# Altium PCB PCB_Arduino Nano扩展板_2021-06-07.pcbdoc
Units mil, origin at the board's own origin, x right, y up, seen from the top; angles counter-clockwise.
Board outline 4955 x 4010 mil, 2 copper layers (Top Layer, Bottom Layer); 42 components, 38 nets, 193 pads, 122 vias.
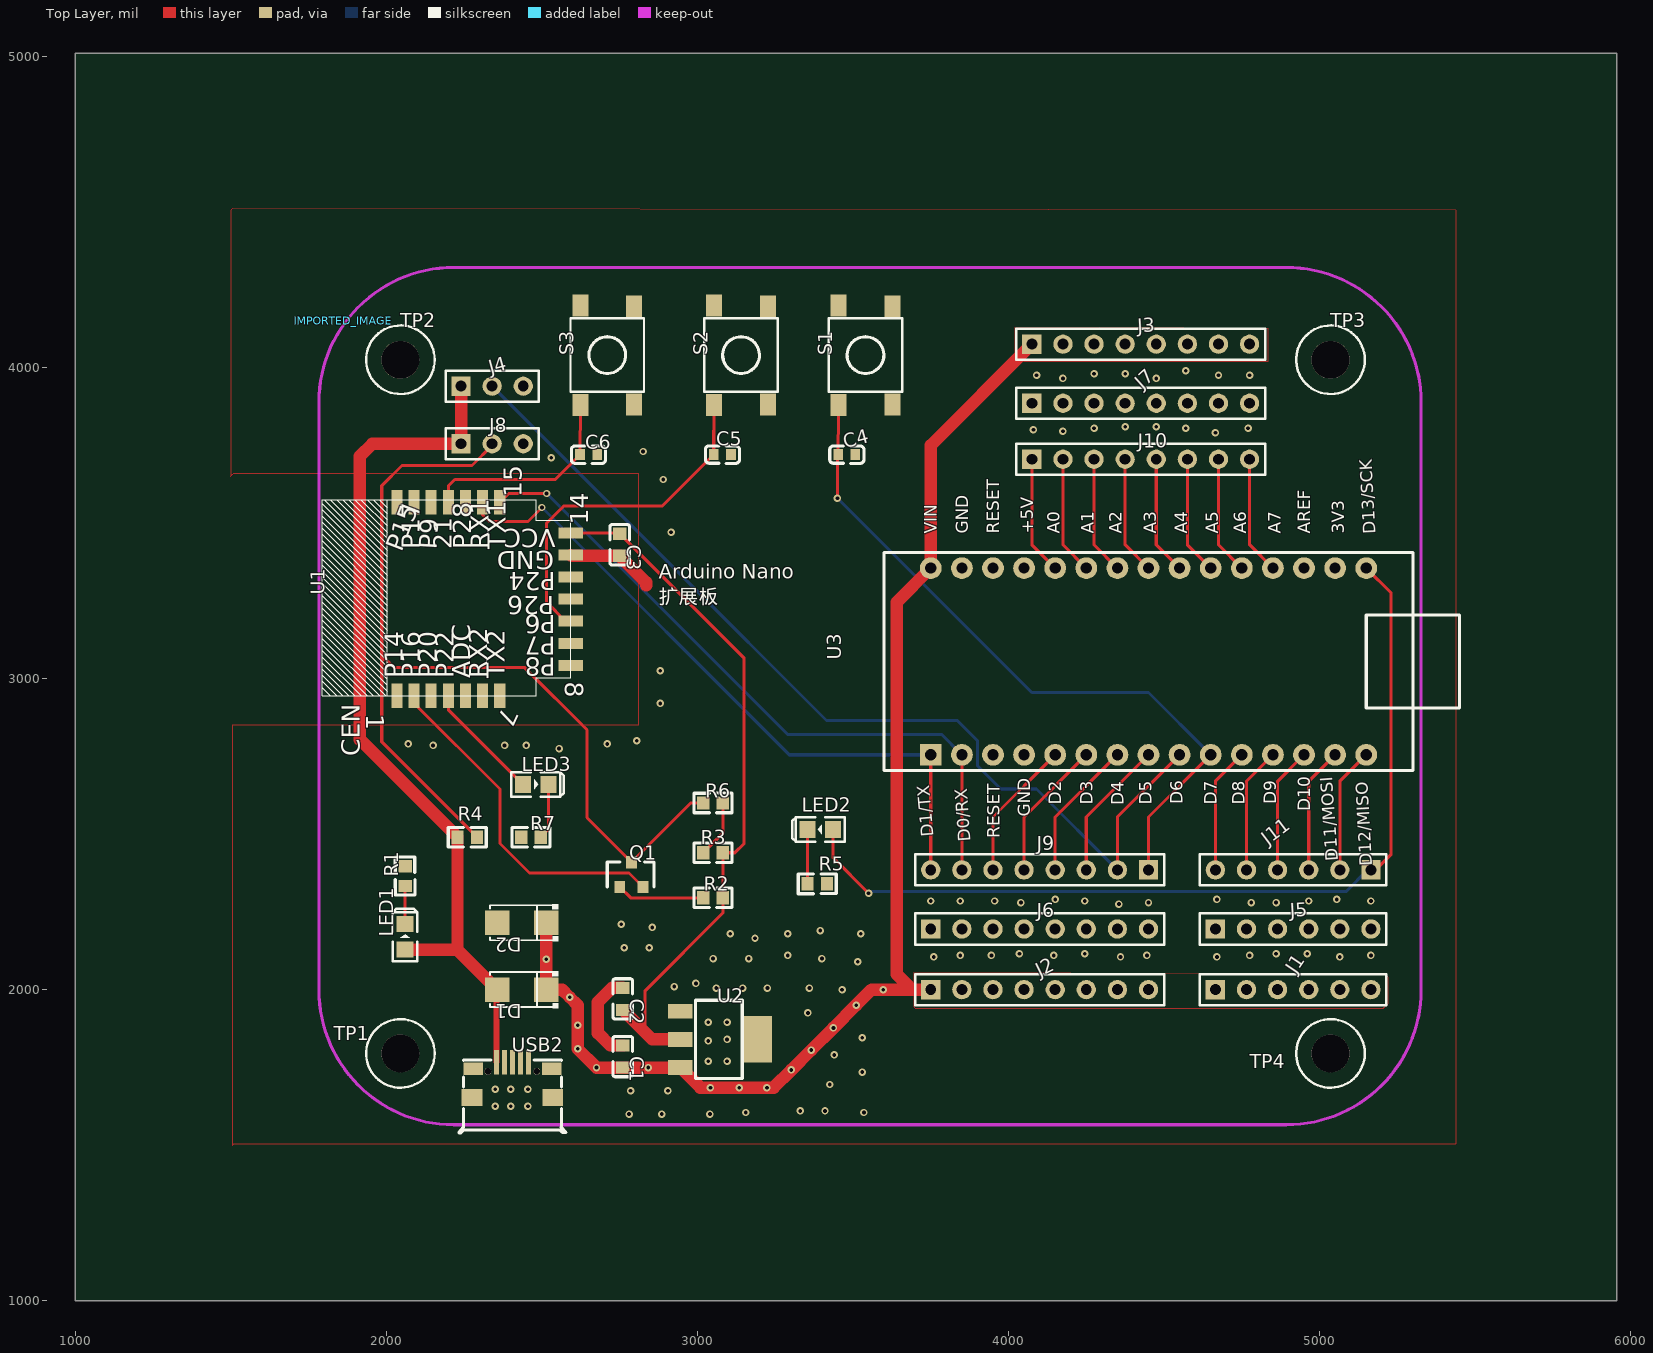
[diagram p0: Top Layer view]
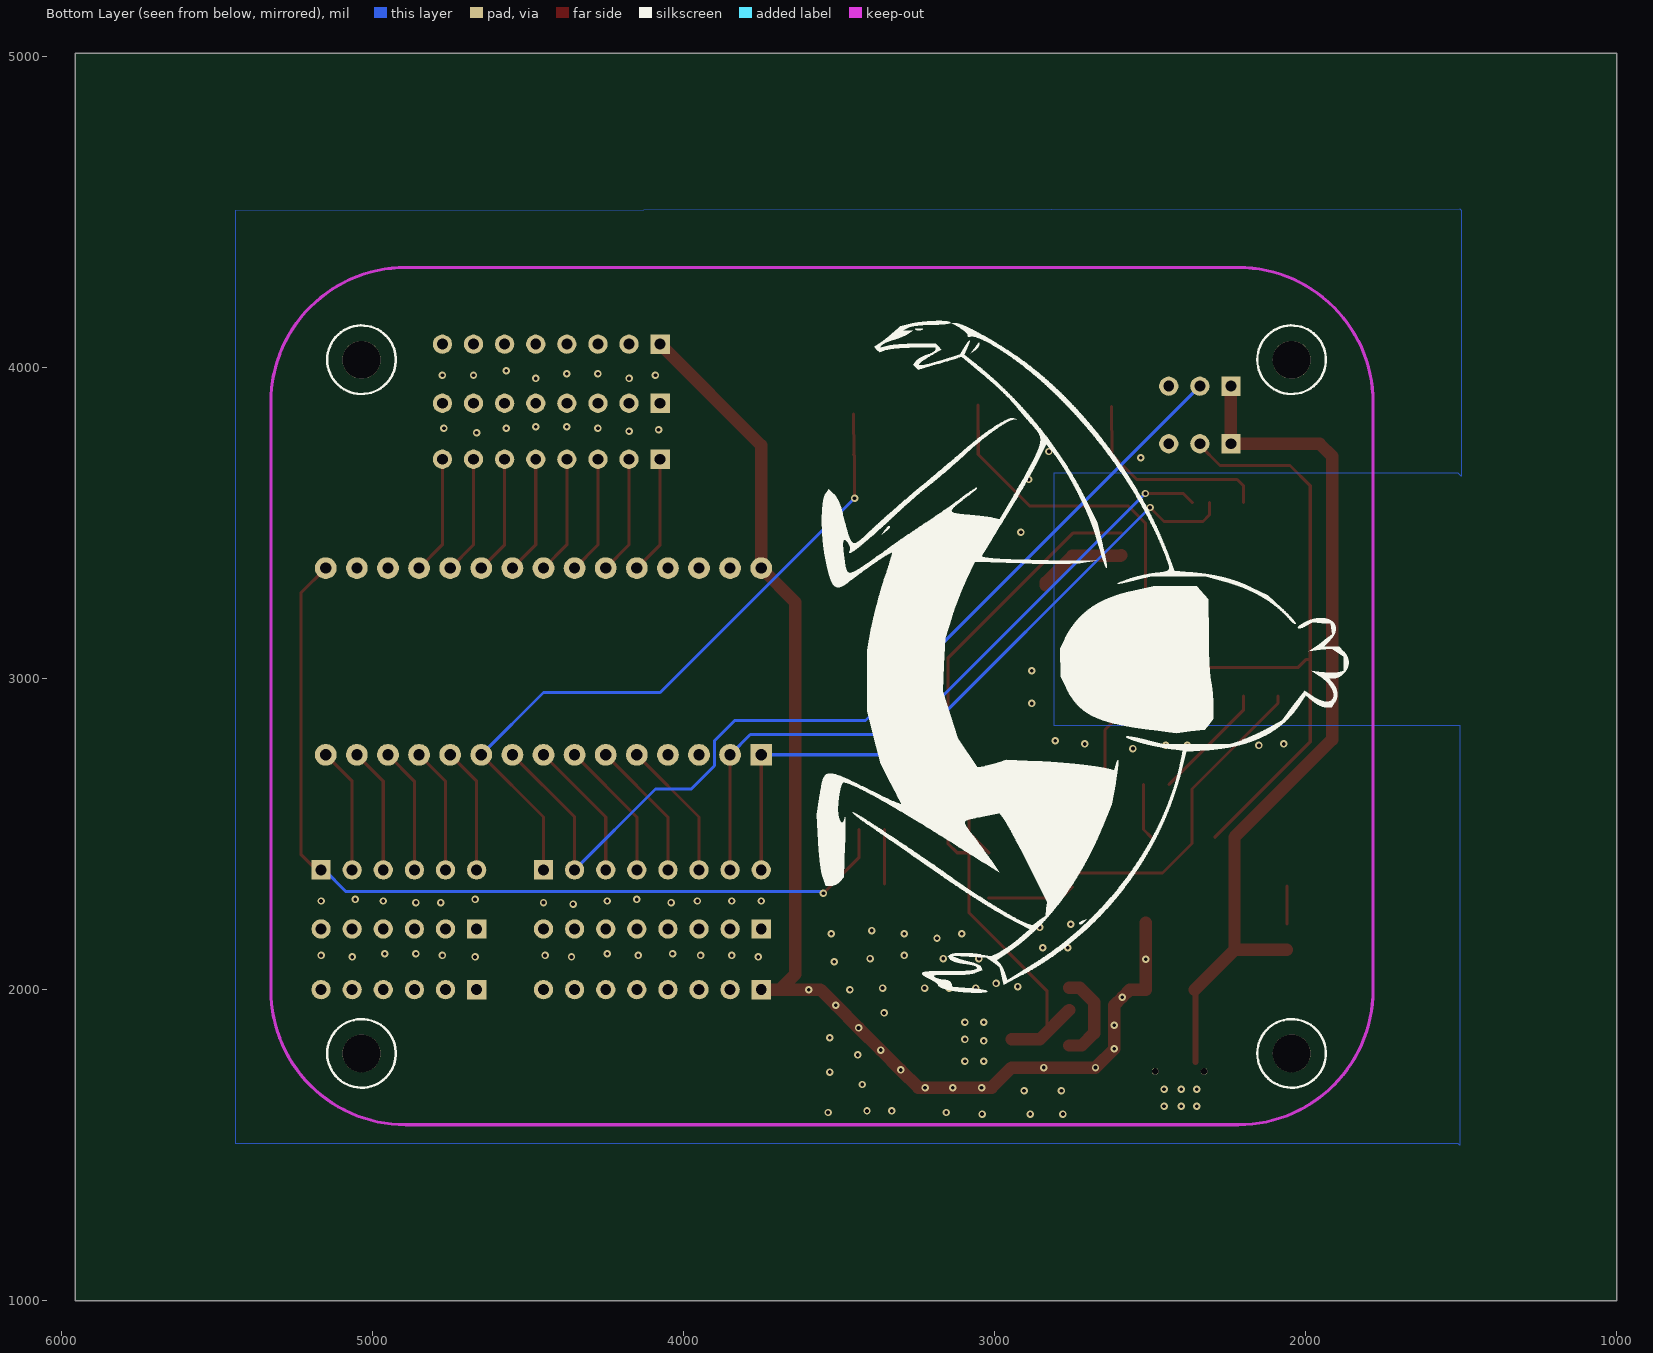
[diagram p1: Bottom Layer view, seen from below]

## Layer stack, top to bottom
Top Layer: signal copper (thickness not stored)
Dielectric: dielectric 12.6, FR-4, Dk 4.8
Bottom Layer: signal copper (thickness not stored)

## Board outline
5955,1000 1000,1000 1000,5010 5955,5010

## Components (designator, comment, footprint, x,y, rotation, side; value= is the part's Value field where it differs from the comment)
C1 "0.1u" C0603#1 2760,1785 r270 top
C2 "0.1u" C0603#1 2760,1970 r270 top
C3 "0.1u" C0603#1 2750,3430 r270 top
C4 "0.1u" C0603#2 3480,3720 r180 top
C5 "0.1u" C0603#2 3080,3720.21 r180 top
C6 "0.1u" C0603#2 2649.96,3719.6 r0 top
D1 "SS14-A" SMA_L4.3-W2.6-LS5.2-RD 2435,2000 r180 top
D2 "SS14-A" SMA_L4.3-W2.6-LS5.2-RD 2435,2215 r180 top
IMPORTED_IMAGE "IMPORTED_IMAGE" IMPORTED_IMAGE 1861.49,4149.64 r0 top
J1 "HDR-M-2.54_1x6" HDR-M-2.54_1X6 4915,2000 r0 top
J2 "HDR-M-2.54_1x8" HDR-M-2.54_1X8 4150,2000 r0 top
J3 "HDR-M-2.54_1x8" HDR-M-2.54_1X8 4475,4075 r0 top
J4 "HDR-M-2.54_1x3" HDR-M-2.54_1X3 2340,3940 r0 top
J5 "HDR-M-2.54_1x6" HDR-M-2.54_1X6 4915,2195 r0 top
J6 "HDR-M-2.54_1x8" HDR-M-2.54_1X8 4150,2195 r0 top
J7 "HDR-M-2.54_1x8" HDR-M-2.54_1X8 4475,3885 r0 top
J8 "HDR-M-2.54_1x3" HDR-M-2.54_1X3 2340,3755 r0 top
J9 "HDR-M-2.54_1x8" HDR-M-2.54_1X8 4050,2385 r180 top
J10 "HDR-M-2.54_1x8" HDR-M-2.54_1X8 4475,3705 r0 top
J11 "HDR-M-2.54_1x6" HDR-M-2.54_1X6 4915,2385 r180 top
LED1 "LED-0805_B" LED0805_BLUE 2060,2170 r90 top
LED2 "LED-0805_B" LED0805_BLUE 3395,2515 r180 top
LED3 "LED-0805_B" LED0805_BLUE 2480,2660 r0 top
Q1 "S8050" SOT-23-NPN 2750,2330 r0 top
R1 "1k" R0603 2060,2365 r90 top
R2 "2k" R0603 3050,2295 r0 top
R3 "2k" R0603 3050,2440 r0 top
R4 "2k" R0603 2260,2490 r180 top
R5 "1k" R0603 3385,2340 r180 top
R6 "0R" R0603 3050,2600 r0 top
R7 "1k" R0603 2465,2490 r0 top
S1 "KEY_SW2" KEY4-SMD 3540,4040 r90 top
S2 "KEY_SW2" KEY4-SMD 3140,4040 r90 top
S3 "KEY_SW2" KEY4-SMD 2710,4040 r90 top
TP1 "M3铜柱" M3铜柱 2045,1795 r0 top
TP2 "M3铜柱" M3铜柱 2045,4025 r0 top
TP3 "M3铜柱" M3铜柱 5035,4025 r0 top
TP4 "M3铜柱" M3铜柱 5035,1795 r0 top
U1 "WIFI_BLE_CBU" WIFI_BLE_CBU 2330,3260 r90 top
U2 "GM1117-3.3ST3T" SOT-223 3070,1840 r0 top
U3 "NUCLEO-L031K6" ARDUINO_NANO 4455,3060 r90 top
USB2 "MICROQTJ" MICRO-USB-SMD_MICROQTJ 2405,1710 r0 top

## Footprints (in the part's own frame and the unit in brackets; to place one, negate y for a bottom-side part, rotate by r counter-clockwise, add the part's x,y. Pads: shape width x height; smd on the part's side, far side on the other; paste and mask are expansions set on the pad)
ARDUINO_NANO [mil]
  rect 70x70 hole 36: 1(-305,705)
  round 70 hole 36: 2(-305,605) 3(-305,505) 4(-305,405) 5(-305,305) 6(-305,205) 7(-305,105) 8(-305,5) 9(-305,-95) 10(-305,-195) 11(-305,-295) 12(-305,-395) 13(-305,-495) 14(-305,-595) 15(-305,-695) 16(295,-695) 17(295,-595) 18(295,-495) 19(295,-395) 20(295,-295) 21(295,-195) 22(295,-95) 23(295,5) 24(295,105) 25(295,205) 26(295,305) 27(295,405) 28(295,505) 29(295,605) 30(295,705)
  silkscreen extent -355,-995 345,855
C0603#1 [mm]
  rect 1x1.1 smd: 1(-0.9,0) 2(0.9,0)
  silkscreen extent -1.65,-0.8 1.65,0.8
C0603#2 [mm]
  rect 0.8x0.9 smd: 1(-0.7,0) 2(0.7,0)
  silkscreen extent -1.41,-0.71 1.39,0.72
HDR-M-2.54_1X3 [mil]
  rect 62x62 hole 35: 1(-100,0)
  round 62 hole 35: 2(0,0) 3(100,0)
  silkscreen extent -150,-50 150,50
HDR-M-2.54_1X6 [mil]
  rect 62x62 hole 35: 1(-250,0)
  round 62 hole 35: 2(-150,0) 3(-50,0) 4(50,0) 5(150,0) 6(250,0)
  silkscreen extent -300,-50 300,50
HDR-M-2.54_1X8 [mil]
  rect 62x62 hole 35: 1(-400,0)
  round 62 hole 35: 2(-300,0) 3(-200,0) 4(-100,0) 5(0,0) 6(100,0) 7(200,0) 8(300,0)
  silkscreen extent -450,-50 350,50
IMPORTED_IMAGE [mil]
KEY4-SMD [mm]
  rect 1.8x1.3 smd: 1(-4.035,-2.2) 2(-4.065,2.2) 3(4.065,2.2) 4(3.965,-2.2)
  silkscreen extent -3,-3 3,3
LED0805_BLUE [mil]
  rect 51.2x55.1 smd: 1(-41.35,0) 2(41.35,0)
  silkscreen extent -79,-39 91,39
M3铜柱 [mm]
  round 3.1 hole 3.1 unplated: ""(0,0)
  Top Layer pour cut-out: -0.009,-2.933 1.452,-2.541 2.522,-1.471 2.913,-0.009 2.521,1.452 1.451,2.521 -0.01,2.913 -1.471,2.521 -2.541,1.452 -2.933,-0.009 -2.542,-1.471 -1.472,-2.541 -0.011,-2.933 -0.011,-2.933 -0.009,-2.933
  Bottom Layer pour cut-out: -0.009,-2.913 1.452,-2.521 2.522,-1.451 2.913,0.011 2.521,1.472 1.451,2.541 -0.01,2.933 -1.471,2.541 -2.541,1.472 -2.933,0.011 -2.542,-1.451 -1.472,-2.521 -0.011,-2.913 -0.011,-2.913 -0.011,-2.913 -0.009,-2.913
  silkscreen extent -2.8,-2.8 2.8,2.8
MICRO-USB-SMD_MICROQTJ [mm]
  rect 0.4x2 smd: 1(-1.3,1.452) 2(-0.65,1.452) 3(0,1.452) 4(0.65,1.452) 5(1.3,1.452)
  rect 1.6x1 smd: 6(-3.2,0.902) 9(3.2,0.902)
  rect 1.7x1.4 smd: 7(-3.3,-1.452) 8(3.3,-1.452)
  round 0.55 hole 0.55 unplated: ""(-2,0.698) ""(2,0.698)
  silkscreen extent -4.37,-4.34 4.38,1.63
R0603 [mm]
  rect 1x1.1 smd: 1(-0.8,0) 2(0.8,0)
  silkscreen extent -1.55,-0.8 1.55,0.81
SMA_L4.3-W2.6-LS5.2-RD [mm]
  rect 2x2 smd: 1(-2,0) 2(2,0)
  silkscreen extent -2.98,-1.5 2.6,1.5
SOT-23-NPN [mil]
  rect 35x40 smd: 1(75,0) 2(0,0) 3(38,80)
  silkscreen extent -40,0 110,80
SOT-223 [mm]
  rect 2x1.2 smd: 1(-3.175,2.3) 2(-3.175,0) 3(-3.175,-2.3)
  rect 2.3x3.8 smd: 4(3.175,0)
  silkscreen extent -1.93,-3.2 1.87,3.2
WIFI_BLE_CBU [mm]
  rect 2x0.9 smd: 1(-8.021,7.527) 2(-8.021,6.127) 3(-8.021,4.727) 4(-8.021,3.326) 5(-8.021,1.926) 6(-8.021,0.526) 7(-8.021,-0.873) 15(7.778,-0.873) 16(7.778,0.526) 17(7.778,1.926) 18(7.778,3.326) 19(7.778,4.727) 20(7.778,6.127) 21(7.778,7.527)
  rect 0.9x2 smd: 8(-5.522,-6.674) 9(-3.721,-6.674) 10(-1.922,-6.674) 11(-0.121,-6.674) 12(1.679,-6.674) 13(3.478,-6.674) 14(5.279,-6.674)
  silkscreen extent -8.02,-6.67 8.01,13.66

## Via types
v1: diameter 24, hole 12, Top Layer to Bottom Layer, 122 vias

## Nets (pads, with @x,y where several pads share a name; then routed paths per layer and width w, separated by ;. In a path a pad name is that pad's centre, name@x,y a point inside that pad or via, vN(x,y) a via of type N, cw(c..) or ccw(c..) an arc to the next point about the centre after c; other vN are vias at no path point)
+3.3V: C2.2 C3.1 R2.2 R3.2 U1.14 U2.2 | length 2305
  Top Layer w10: U1.14 2747.61,3467.82 C3.1 ; C3.1 3150,3065.4 3150,2470 3120,2440 R3.2 R2.2 3081.5,2246.5 2831.6,1996.6 2831.6,1862.9
  Top Layer w40: C2.2 2854.57,1840 U2.2
+5V: D1.2 J4.1 J8.1 LED1.1 R4.2 USB2.1 | length 3007.7
  Top Layer w20: USB2.1 2353.8,1997.55 D1.2
  Top Layer w40: LED1.1 2227.6,2128.65 D1.2 2228.51,2127.74 R4.2 1915,2803.51 1915,3715 1955,3755 J8.1 J4.1
A0: J10.8 U3.19 | length 381.1
  Top Layer w10: J10.8 4775,3430 U3.19
A1: J10.7 U3.20 | length 381.1
  Top Layer w10: J10.7 4675,3430 U3.20
A2: J10.6 U3.21 | length 381.1
  Top Layer w10: J10.6 4575,3430 U3.21
A3: J10.5 U3.22 | length 381.1
  Top Layer w10: J10.5 4475,3430 U3.22
A4: J10.4 U3.23 | length 381.1
  Top Layer w10: J10.4 4375,3430 U3.23
A5: J10.3 U3.24 | length 381.1
  Top Layer w10: J10.3 4275,3430 U3.24
A6: J10.2 U3.25 | length 381.1
  Top Layer w10: J10.2 4175,3430 U3.25
A7: J10.1 U3.26 | length 381.1
  Top Layer w10: J10.1 4075,3430 U3.26
D2: J9.6 U3.5 | length 452.8
  Top Layer w10: J9.6 3950,2555 U3.5
D3: J9.5 U3.6 | length 452.8
  Top Layer w10: J9.5 4050,2555 U3.6
D4: J9.4 U3.7 | length 452.8
  Top Layer w10: J9.4 4150,2555 U3.7
D5: J9.3 U3.8 | length 452.8
  Top Layer w10: J9.3 4250,2555 U3.8
D6: J4.2 J9.2 U3.9 | length 3153.8
  Top Layer w10: J9.2 4350,2555 U3.9
  Bottom Layer w10: J4.2 2915.17,3364.83 3415,2865 3835,2865 3900,2800 3900,2720 3975,2645 4090,2645 J9.2
D7: C4.2 J9.1 S1.2 U3.10 | length 2265.6
  Top Layer w10: v1(3450,3580) 3450,3717.56 C4.2 ; C4.2 S1.2@3453.4,3850 ; J9.1 4450,2555 U3.10
  Bottom Layer w10: v1(3450,3580) 4075,2955 4450,2955 U3.10
D8: J11.6 U3.11 | length 405.2
  Top Layer w10: J11.6 4665,2670 U3.11
D9: J11.5 U3.12 | length 405.2
  Top Layer w10: J11.5 4765,2670 U3.12
D10: J11.4 U3.13 | length 405.2
  Top Layer w10: J11.4 4865,2670 U3.13
D11: J11.3 U3.14 | length 405.2
  Top Layer w10: J11.3 4965,2670 U3.14
D12: J11.2 U3.15 | length 405.2
  Top Layer w10: J11.2 5065,2670 U3.15
D13: J11.1 LED2.1 U3.16 | length 2937
  Top Layer w10: LED2.1@3436.3,2515 3436.3,2423.7 v1(3550,2310) ; U3.16 5230,3275 5230,2435 5180,2385 J11.1
  Bottom Layer w10: v1(3550,2310) 3555,2315 5085,2315 5155,2385 J11.1
GND: C1.1 C2.1 C3.2 C4.1 C5.1 C6.2 D2.2 J4.3 J5.1 J5.2 J5.3 J5.4 J5.5 J5.6 J6.1 J6.2 J6.3 J6.4 J6.5 J6.6 J6.7 J6.8 J7.1 J7.2 J7.3 J7.4 J7.5 J7.6 J7.7 J7.8 J8.3 R1.2 R5.1 R7.1 S1.1 S2.1 S3.1 U1.13 U2.1 U3.29 USB2.5 USB2.6 USB2.7 USB2.8 USB2.9 | length 583.2
  Top Layer w40: U1.13@2592.74,3396.95 2595.12,3394.57 C3.2 2835,3309.57 2835,3300 ; C1.1 2719.6,1820.4 2680,1860 2680,1960 2725.4,2005.4 C2.1
  other v1: 2780,1600 2885,1600 3040,1600 3155,1605 3535,1605 3330,1610 3410,1610 2350,1625 2400,1625 2455,1625 2785,1675 2905,1675 2350,1680 2400,1680 2455,1680 3425,1695 3530,1735 3035,1770 3095,1770 3440,1790 3035,1835 3095,1840 3530,1845 3035,1895 3095,1895 3355,1925 3465,2000 3060,2005 3145,2005 3225,2005 3360,2005 2925,2010 2995,2020 3515,2090 3050,2100 3165,2100 3400,2100 3760,2105 4360,2105 4670,2105 5065,2105 3290,2110 3845,2110 3945,2110 4145,2110 4445,2110 4775,2110 5165,2110 4035,2115 4245,2115 4860,2115 4960,2115 2765,2135 2845,2135 3185,2165 3105,2180 3290,2180 3525,2180 3395,2190 2855,2200 2755,2210 4355,2275 4040,2280 4450,2280 4780,2280 4860,2280 3750,2285 3845,2285 3955,2285 4245,2285 4965,2285 5165,2285 4150,2290 4670,2290 5055,2290 2555,2775 2150,2785 2380,2785 2450,2785 2070,2790 2710,2790 2805,2800 2880,2920 2880,3025 2915,3470 2890,3640 2530,3710 2825,3730 4665,3790 4175,3795 4080,3800 4275,3805 4570,3805 4770,3805 4375,3810 4475,3810 4175,3965 4475,3965 4090,3975 4675,3975 4775,3975 4275,3980 4375,3980 4570,3990
OUT_RGB_CBU: J8.2 Q1.3 R4.1 R6.1 | length 3217.8
  Top Layer w10: 1985,3060.8 1999.2,3060.8 2025,3035 2445,3035 2645,2835 2645,2553 Q1.3 2978,2600 R6.1 ; R4.1 1985,2796.5 1985,3620 2050,3685 2275,3685 2340,3750 J8.2
P6: C5.2 S2.2 U1.10 | length 1146.2
  Top Layer w10: U1.10@2592.7,3184.4 2575.6,3184.4 2515,3245 2515,3500 2570,3555 2887.2,3555 C5.2 S2.2
P16: Q1.1 U1.2 | length 1106.6
  Top Layer w10: U1.2 2088.8,2921.2 2365,2645 2365,2470 2460,2375 2780,2375 Q1.1
P22: LED3.1 U1.4 | length 383.4
  Top Layer w10: U1.4 2199.04,2899.61 LED3.1
Q1_2: Q1.2 R2.1 | length 283
  Top Layer w10: Q1.2 2785,2295 R2.1
R1_1: LED1.2 R1.1 | length 122.2
  Top Layer w10: LED1.2 R1.1
R3_1: R3.1 R6.2 | length 186.1
  Top Layer w10: R3.1 3081.49,2502.99 R6.2
R5_2: LED2.2 R5.2 | length 175
  Top Layer w10: R5.2 LED2.2@3353.7,2515
R7_2: LED3.2 R7.2 | length 180.3
  Top Layer w10: R7.2 2521.35,2514.86 LED3.2
RST: C6.1 S3.2 U1.18 | length 673.2
  Top Layer w10: U1.18 2199.04,3619.04 2220,3640 2542.8,3640 C6.1 S3.2@2623.39,3874.96
RXD: J9.7 U1.15 U3.2 | length 2215.5
  Top Layer w10: U1.15 2393.15,3595 v1(2515,3595) ; J9.7 U3.2
  Bottom Layer w10: v1(2515,3595) 3290,2820 3785,2820 U3.2
S$21: 
S$23: 
TXD: J9.8 U1.16 U3.1 | length 2207.7
  Top Layer w10: U1.16 2309.3,3525.7 2330,3505 2455,3505 v1(2500,3550) ; J9.8 U3.1
  Bottom Layer w10: v1(2500,3550) 3295,2755 U3.1
VCC: C1.2 D1.1 D2.1 J1.1 J1.2 J1.3 J1.4 J1.5 J1.6 J2.1 J2.2 J2.3 J2.4 J2.5 J2.6 J2.7 J2.8 J3.1 J3.2 J3.3 J3.4 J3.5 J3.6 J3.7 J3.8 U2.3 U3.30 | length 4130.6
  Top Layer w40: D2.1 v1(2513.75,2097.61) D1.1 2565,2000 v1(2589.38,1975.62) 2615,1950 v1(2615,1885.61) v1(2615,1810) v1(2675.43,1749.57) C1.2 ; C1.2 v1(2842.04,1749.56) U2.3@2945,1749.5 ; U2.3@2945,1749.45 3009.45,1685 v1(3041.73,1685) v1(3134.33,1685) v1(3223.22,1685) 3245,1685 v1(3301.82,1741.82) v1(3365.7,1805.7) v1(3437,1877) v1(3510.15,1950.15) 3560,2000 v1(3597.29,2000) J2.1 3690,2000 3640,2050 3640,2070.5 ; 3640,2070 3640,3245 U3.30 3750,3750 J3.1
pads on no net: S1.3 S1.4 S2.3 S2.4 S3.3 S3.4 TP1. TP2. TP3. TP4. U1.1 U1.3 U1.5 U1.6 U1.7 U1.8 U1.9 U1.11 U1.12 U1.17 U1.19 U1.20 U1.21 U2.4 U3.3 U3.4 U3.17 U3.18 U3.27 U3.28 USB2. USB2.2 USB2.3 USB2.4

## Polygon pours and split planes (outlines as drawn)
VCC on Top Layer (solid): 3695,2055 3695,1945 3700,1940 5205,1940 5220,1955 5220,2040 5210,2050
VCC on Top Layer (solid): 4020,4130 4020,4025 4025,4020 4835,4020 4835,4125
GND on Top Layer (solid): 1505,4510 1500,4505 1500,3650 1510,3660 2810,3660 2810,2850 1505,2850 1505,1500 1510,1505 5440,1505 5440,4505
GND on Bottom Layer (solid): 1505,4510 1500,4505 1500,3650 1510,3660 2810,3660 2810,2850 1505,2850 1505,1500 1510,1505 5440,1505 5440,4505

## Keep-outs
Keep-Out Layer:
  lines w10: 1783.23,1998.7 ccw(c2216.3,1998.7) 2216.3,1565.63 ; 1783.23,3888.46 cw(c2216.3,3888.46) 2216.3,4321.53 ; 4893.47,1565.63 ccw(c4893.47,1998.7) 5326.54,1998.7 ; 4893.47,4321.53 cw(c4893.47,3888.46) 5326.54,3888.46

## Silkscreen, mask and mechanical layers (free items; w line width, h text height)
Top Overlay:
  text "Arduino Nano / 扩展板" at 2875,3225 h80

## Text inside footprints (layer, text, board x,y; h text height)
U1: Top Overlay "P15" at 2049.78,3404.71 h59.06 r69; Top Overlay "P17" at 2107.6,3415.29 h59.06 r90; Top Overlay "P9" at 2162.16,3413.74 h59.06 r87; Top Overlay "CEN" at 1914.53,2750 h59.06 r90; Top Overlay "P28" at 2272.65,3415.29 h59.06 r90; Top Overlay "RX1" at 2328.51,3415.29 h59.06 r90; Top Overlay "TX1" at 2383.74,3415.29 h59.06 r90; Top Overlay "GND" at 2540,3409.53 h59.06 r180; Top Overlay "VCC" at 2543.68,3480.22 h59.06 r180; Top Overlay "TX2" at 2379.74,3001.22 h59.06 r90; Top Overlay "RX2" at 2324.69,3001.22 h59.06 r90; Top Overlay "ADC" at 2270.27,3001.22 h59.06 r90; Top Overlay "P22" at 2215.85,3001.22 h59.06 r90; Top Overlay "P20" at 2161.43,3001.22 h59.06 r90; Top Overlay "P16" at 2107.64,3001.22 h59.06 r90; Top Overlay "P14" at 2052.59,3001.22 h59.06 r90; Top Overlay "21" at 2209.53,3415 h59.06 r90; Top Overlay "1" at 1934.47,2885.14 h59.06 r270; Top Overlay "P24" at 2543.74,3341.59 h59.06 r180; Top Overlay "P26" at 2540,3264.53 h59.06 r180; Top Overlay "P6" at 2543.74,3203.76 h59.06 r180; Top Overlay "P7" at 2543.74,3135.22 h59.06 r180; Top Overlay "P8" at 2543.74,3066.22 h59.06 r180; Top Overlay "7" at 2376.24,2911.62 h59.06 r245; Top Overlay "8" at 2575.68,2989.22 h59.06 r270; Top Overlay "14" at 2649.53,3495 h59.06 r90; Top Overlay "15" at 2434.74,3582.22 h59.06 r90
U3: Top Overlay "RESET" at 3970,3465 h40 r90; Top Overlay "A7" at 4874.6,3465 h40 r90; Top Overlay "A6" at 4764.6,3465 h40 r90; Top Overlay "A5" at 4674.6,3465 h40 r90; Top Overlay "A4" at 4574.6,3465 h40 r90; Top Overlay "A3" at 4474.6,3465 h40 r90; Top Overlay "A2" at 4364.6,3465 h40 r90; Top Overlay "A1" at 4274.6,3465 h40 r90; Top Overlay "A0" at 4164.6,3465 h40 r90; Top Overlay "AREF" at 4970,3465 h40 r90; Top Overlay "3V3" at 5080,3465 h40 r90; Top Overlay "D11/MOSI" at 5059.95,2414.9 h40 r94; Top Overlay "D10" at 4970,2573.5 h40 r90; Top Overlay "D9" at 4860,2596.4 h40 r90; Top Overlay "D8" at 4760,2594.6 h40 r90; Top Overlay "D7" at 4670,2594.6 h40 r90; Top Overlay "D6" at 4560,2596.4 h40 r90; Top Overlay "D5" at 4460,2594.6 h40 r90; Top Overlay "D4" at 4370,2592.8 h40 r90; Top Overlay "D3" at 4270,2594.6 h40 r90; Top Overlay "D2" at 4170,2594.6 h40 r90; Top Overlay "RESET" at 3971.8,2485.9 h40 r90; Top Overlay "D0/RX" at 3879.05,2476.4 h40 r94; Top Overlay "GND" at 4070,2555.3 h40 r90; Top Overlay "D13/SCK" at 5179.97,3466.05 h40 r93; Top Overlay "VIN" at 3770,3465 h40 r90; Top Overlay "D12/MISO" at 5169.97,2398.15 h40 r93; Top Overlay "+5V" at 4080,3465 h40 r90; Top Overlay "GND" at 3870,3465 h40 r90; Top Overlay "D1/TX" at 3759.02,2493.04 h40 r95